# Altium PCB Bpod Controller.PcbDoc
Units mm, origin at the board's own origin, x right, y up, seen from the top; angles counter-clockwise.
Board outline 222.25 x 73.66 mm, 2 copper layers (Top Layer, Bottom Layer); 35 components, 56 nets, 221 pads, 0 vias.
Unrouted connection lines stored in the file: 108.
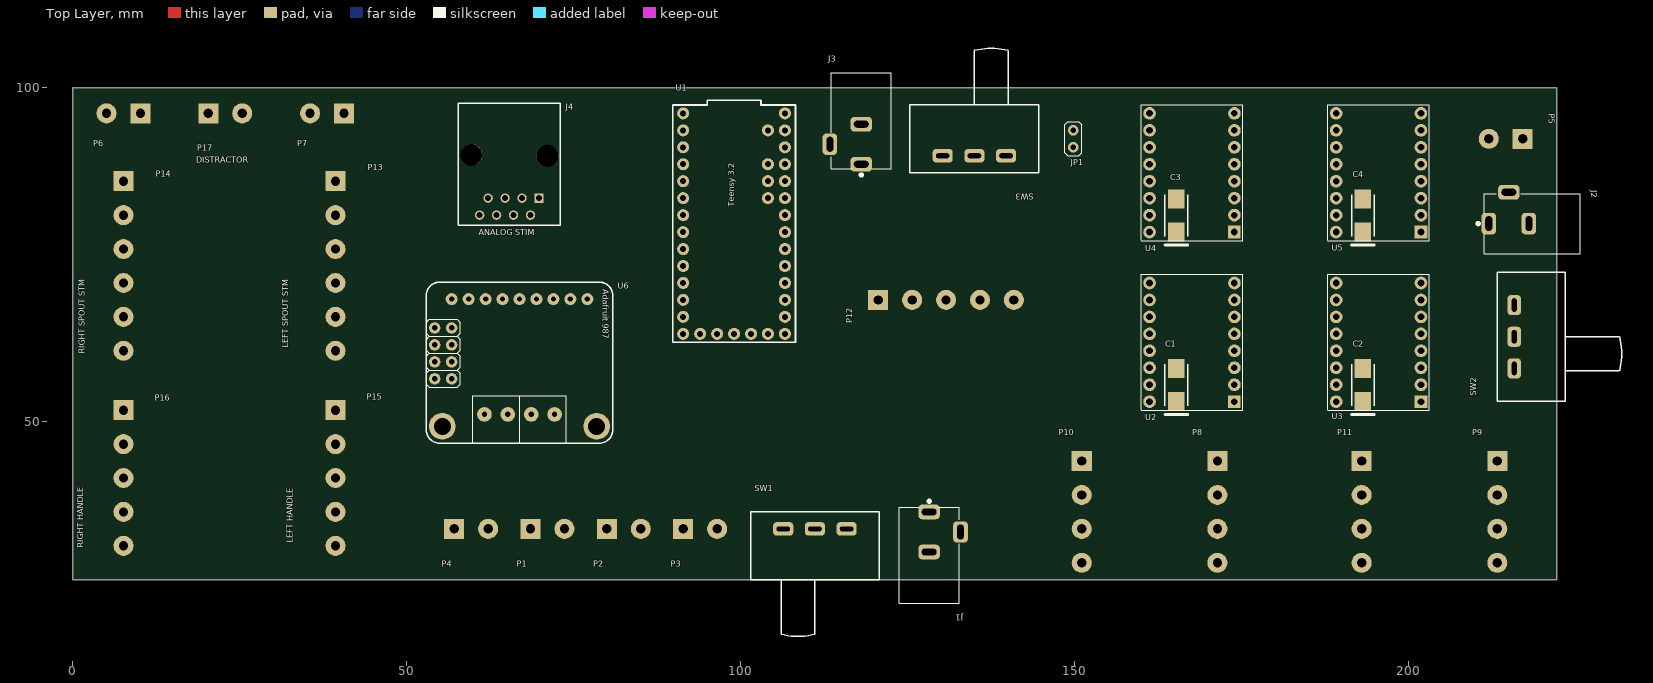
[diagram p0: Top Layer view]
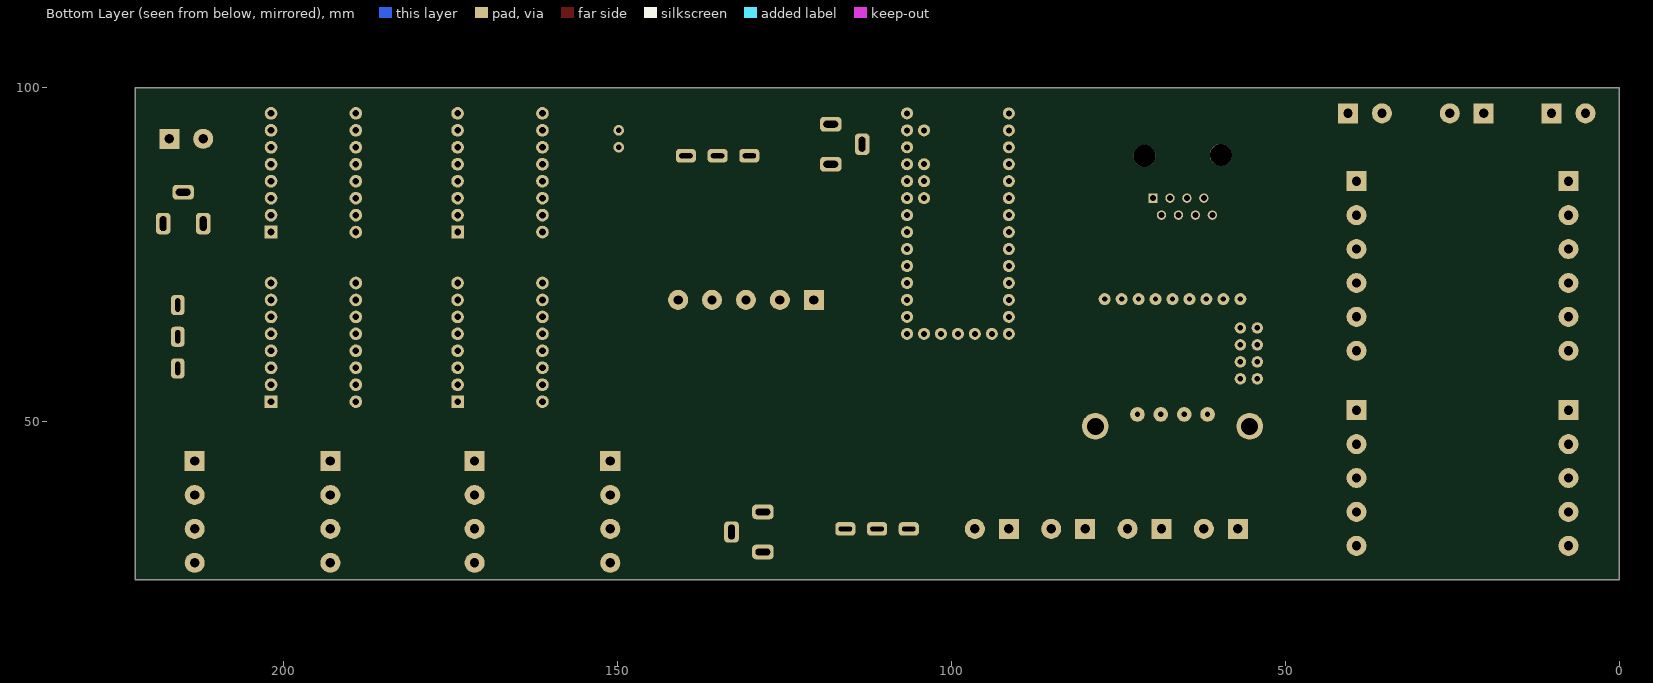
[diagram p1: Bottom Layer view, seen from below]

## Layer stack, top to bottom
Top Solder: solder mask 0.0102, Solder Resist, Dk 3.5
Top Layer: signal copper 0.0356
Dielectric 1: dielectric 0.32, FR-4, Dk 4.8
Bottom Layer: signal copper 0.0356
Bottom Solder: solder mask 0.0102, Solder Resist, Dk 3.5

## Board outline
0,26.34 0,100 222.25,100 222.25,26.34

## Design rules (kind name [scope] priority, off if disabled: settings)
Clearance [All] p1: gap=0.254 ignorepadtopadclearanceinfootprint=FALSE
PolygonConnect [All] p1: connectstyle=Relief reliefconductorwidth=0.254 reliefentries=4 polygonreliefangle="90 Angle" airgapwidth=0.254
RoutingVias [All] p1: holewidth=0.711 width=1.27 viastyle="Through Hole" minholewidth=0.711 minwidth=1.27 maxholewidth=0.711 maxwidth=1.27
SolderMaskExpansion [All] p1: expansion=0.102 istentingtop=FALSE
SupplyNets "Schematic Supply Nets_4" [InNet('GND1')] p1: voltage=0.000
SupplyNets "Schematic Supply Nets_3" [InNet('+12V')] p2: voltage=0.000
SupplyNets "Schematic Supply Nets_2" [InNet('+9V')] p3: voltage=0.000
SupplyNets "Schematic Supply Nets_1" [InNet('+5V')] p4: voltage=0.000
SupplyNets "Schematic Supply Nets" [InNet('GND')] p5: voltage=0.000
Width [All] p1: maxlimit=0.254 minlimit=0.254 preferedwidth=0.254
30 further rules are at their usual default settings.

## Components (designator, comment, footprint, x,y, rotation, side; value= is the part's Value field where it differs from the comment)
C1 "TAJC107K016RNJ" AVX-TAJ-C-2_M 165.291,55.485 r90 top locked value=100µF
C2 "TAJC107K016RNJ" AVX-TAJ-C-2_M 193.231,55.485 r90 top locked value=100µF
C3 "TAJC107K016RNJ" AVX-TAJ-C-2_M 165.291,80.885 r90 top locked value=100µF
C4 "TAJC107K016RNJ" AVX-TAJ-C-2_M 193.231,80.885 r90 top locked value=100µF
J1 "PJ-102AH" CUI_PJ-102AH 128.271,30 r270 top locked
J2 "PJ-102AH" CUI_PJ-102AH 218.591,79.68 r0 top locked
J3 "PJ-102AH" CUI_PJ-102AH 118.111,95.07 r90 top locked
J4 "5569118-1" 5569118-1-Footprint-1 71.121,89.84 r180 top locked
JP1 "SL 2 025 2 S" "SL 2_025_ 72_S-Footprint-1" 149.861,91.11 r180 top locked
P1 "282825-2" 282825-4-Footprint-1#1 68.581,33.96 r90 top locked
P2 "282825-2" 282825-4-Footprint-1#1 80.011,33.96 r90 top locked
P3 "282825-2" 282825-4-Footprint-1#1 91.441,33.96 r90 top locked
P4 "282825-2" 282825-4-Footprint-1#1 57.151,33.96 r90 top locked
P5 "282825-2" 282825-4-Footprint-1#1 217.171,92.38 r270 top locked
P6 "282825-2" 282825-4-Footprint-1#1 10.16,96.19 r270 top locked
P7 "282825-2" 282825-4-Footprint-1#1 40.641,96.19 r270 top locked
P8 "282825-4" 282825-4-Footprint-1#2 171.451,44.12 r0 top locked
P9 "282825-4" 282825-4-Footprint-1#2 213.361,44.12 r0 top locked
P10 "282825-4" 282825-4-Footprint-1#2 151.131,44.12 r0 top locked
P11 "282825-4" 282825-4-Footprint-1#2 193.041,44.12 r0 top locked
P12 "282825-5" 282825-4-Footprint-1#3 120.651,68.25 r90 top locked
P13 "282825-6" 282825-4-Footprint-1#4 39.371,86.03 r0 top locked
P14 "282825-6" 282825-4-Footprint-1#4 7.621,86.03 r0 top locked
P15 "282825-5" 282825-4-Footprint-1#3 39.371,51.74 r0 top locked
P16 "282825-5" 282825-4-Footprint-1#3 7.621,51.74 r0 top locked
P17 "282825-2" 282825-4-Footprint-1#1 20.321,96.19 r90 top locked
SW1 "L102021ML04Q" L102021ML04Q-Footprint-1 106.426,33.96 r0 top locked
SW2 "L102021ML04Q" L102021ML04Q-Footprint-1 215.901,57.985 r90 top locked
SW3 "L102021ML04Q" L102021ML04Q-Footprint-1 139.806,89.84 r180 top locked
U1 "Teensy 3.2" "New footprint 1" 91.441,96.19 r0 top locked
U2 "DRV8834" "DRV8825 STEPPER MOTOR DRIVER CARRIER-Footprint-1" 173.991,53.01 r180 top locked
U3 "DRV8834" "DRV8825 STEPPER MOTOR DRIVER CARRIER-Footprint-1" 201.931,53.01 r180 top locked
U4 "DRV8834" "DRV8825 STEPPER MOTOR DRIVER CARRIER-Footprint-1" 173.991,78.41 r180 top locked
U5 "DRV8834" "DRV8825 STEPPER MOTOR DRIVER CARRIER-Footprint-1" 201.931,78.41 r180 top locked
U6 "987" 987-Footprint-1 77.09,68.377 r270 top locked

## Footprints (in the part's own frame and the unit in brackets; to place one, negate y for a bottom-side part, rotate by r counter-clockwise, add the part's x,y. Pads: shape width x height; smd on the part's side, far side on the other; paste and mask are expansions set on the pad)
987-Footprint-1 [mm]
  round 1.8 hole 0.8: 1(0,0) 2(0,-2.54) 3(0,-5.08) 4(0,-7.62) 5(0,-10.16) 6(0,-12.7) 7(0,-15.24) 8(0,-17.78) 9(0,-20.32)
  round 2.2 hole 0.8: 10(17.272,-4.91) 11(17.272,-8.41) 12(17.272,-11.91) 13(17.272,-15.41)
  round 1.7 hole 0.8: 14(4.318,-20.32) 15(4.318,-22.86) 16(6.858,-20.32) 17(6.858,-22.86) 18(9.398,-20.32) 19(9.398,-22.86) 20(11.938,-20.32) 21(11.938,-22.86)
  round 4 hole 2.54: 22(19.05,1.397) 23(19.05,-21.717)
  silkscreen extent -2.54,-24.13 21.59,3.81, body extent -1.25,-21.59 1.25,1.27, height 8
282825-4-Footprint-1#1 [mm]
  rect 3x3 hole 1.4 paste-2539.97: 1(0,0)
  round 3 hole 1.4 paste-2539.97: 2(0,-5.08)
  body extent -4.5,-7.62 3.85,2.54, height 12
282825-4-Footprint-1#2 [mm]
  rect 3x3 hole 1.4 paste-2539.97: 1(0,0)
  round 3 hole 1.4 paste-2539.97: 2(0,-5.08) 3(0,-10.16) 4(0,-15.24)
  body extent -4.5,-17.78 3.85,2.54, height 12
282825-4-Footprint-1#3 [mm]
  rect 3x3 hole 1.4 paste-2539.97: 1(0,0)
  round 3 hole 1.4 paste-2539.97: 2(0,-5.08) 3(0,-10.16) 4(0,-15.24) 5(0,-20.32)
  body extent -4.5,-22.86 3.85,2.54, height 12
282825-4-Footprint-1#4 [mm]
  rect 3x3 hole 1.4 paste-2539.97: 1(0,0)
  round 3 hole 1.4 paste-2539.97: 2(0,-5.08) 3(0,-10.16) 4(0,-15.24) 5(0,-20.32) 6(0,-25.4)
  body extent -4.5,-27.94 3.85,2.54, height 12
5569118-1-Footprint-1 [mm]
  rect 1.4x1.4 hole 0.9: 1(1.27,6.35)
  round 1.4 hole 0.9: 2(2.54,8.89) 3(3.81,6.35) 4(5.08,8.89) 5(6.35,6.35) 6(7.62,8.89) 7(8.89,6.35) 8(10.16,8.89)
  round 3.3 hole 3.3: X(0,0) Y(11.43,-0.127)
  silkscreen extent -1.91,-7.87 13.33,10.42, body extent -1.91,-7.95 13.33,10.31, height 12.6
AVX-TAJ-C-2_M [mm] "Molded Capacitor, 2-Leads, Body 6.2x3.4mm, IPC Low Density"
  rect 2.85x2.45 smd: 1(-2.475,0) 2(2.475,0)
  silkscreen extent -4.4,-1.7 3.1,1.7, body extent -3.32,-1.7 3.32,1.7, height 2.8
CUI_PJ-102AH [mm]
  rrect50% 2.2x3.2 hole 1 slot 2.2 at 90 deg: 1(-6.5,0) 2(-0.5,0)
  rrect50% 3.2x2.2 hole 1 slot 2.2 at 0 deg: 3(-3.5,4.7)
  silkscreen extent -8.3,-4.5 7.2,4.5, body extent -7.2,-4.5 7.2,4.9, height 11
"DRV8825 STEPPER MOTOR DRIVER CARRIER-Footprint-1" [mm]
  rect 1.9x1.9 hole 1: 1(0,0)
  round 1.9 hole 1: 2(0,-2.54) 3(0,-5.08) 4(0,-7.62) 5(0,-10.16) 6(0,-12.7) 7(0,-15.24) 8(0,-17.78) 9(12.7,-17.78) 10(12.7,-15.24) 11(12.7,-12.7) 12(12.7,-10.16) 13(12.7,-7.62) 14(12.7,-5.08) 15(12.7,-2.54) 16(12.7,0)
  silkscreen extent -1.27,-19.05 13.93,1.27, body extent -1.25,-19.05 13.99,1.28, height 13.72
L102021ML04Q-Footprint-1 [mm]
  rrect50% 3x2 hole 0.7 slot 2 at 0 deg: 1(0,0) 2(4.75,0) 3(9.5,0)
  silkscreen extent -4.9,-16.1 14.4,2.54, body extent -4.9,-16.12 14.4,4.32, height 10.46
"New footprint 1" [mm]
  round 1.8 hole 0.9 paste-2539.97: 1(0,0) 2(0,-2.54) 3(0,-5.08) 4(0,-7.62) 5(0,-10.16) 6(0,-12.7) 7(0,-15.24) 8(0,-17.78) 9(0,-20.32) 10(0,-22.86) 11(0,-25.4) 12(0,-27.94) 13(0,-30.48) 14(0,-33.02) 15(2.54,-33.02) 16(5.08,-33.02) 17(7.62,-33.02) 18(10.16,-33.02) 19(12.7,-33.02) 20(15.24,-33.02) 21(15.24,-30.48) 22(15.24,-27.94) 23(15.24,-25.4) 24(15.24,-22.86) 25(15.24,-20.32) 26(15.24,-17.78) 27(15.24,-15.24) 28(15.24,-12.7) 29(15.24,-10.16) 30(15.24,-7.62) 31(15.24,-5.08) 32(15.24,-2.54) 33(15.24,0) 34(12.7,-2.54) 35(12.7,-7.62) 36(12.7,-10.16) 37(12.7,-12.7)
  silkscreen extent -1.57,-34.27 16.81,1.95, body extent -1.25,-34.29 16.49,1.27, height 8
"SL 2_025_ 72_S-Footprint-1" [mm]
  round 1.6 hole 0.8: 1(0,0) 2(0,-2.54)
  silkscreen extent -1.27,-3.81 1.27,1.27, body extent -1.27,-3.77 1.27,1.23, height 8.6

## Part data
C1 C2 C3 C4: library part CMP-001-00046-9, "Standard Tantalum, 100 uF, +/- 10%, 16 V, -55 to 125 degC, 2312 (6032 Metric), RoHS, Tape and Reel", Capacitor Type=Tantalum, Case/Package=2412, Manufacturer=AVX, Max Operating Temperature=125°C, Min Operating Temperature=-55°C, Package Description="2-Pin Surface Mount Device, Body 6 x 3.25 mm", Package Quantity=500, Package Reference=TAJ-C-2, Resistance=1Ohm, Tolerance=10%, Voltage Rating=16V, Datasheet URL=http://datasheets.avx.com/TAJ.pdf, Datasheet Version=Feb-16, ESR=1Ohm, Manufacturer URL=http://www.avx.com/, Mounting Technology=SM, Packaging=TapeandReel, RoHS Compliant=True
J1 J2 J3: library part CMP-00027-00002-4, "12V, 2.5A, 2mm Dia", Mounting Technology=Board, Pins=3, RoHS Compliant=Yes, user=IBI-TAE
J4: library part CMP-002-00096-4, "Telecom and Datacom Connector, 8 Contact(s), Female, Right Angle, Solder Terminal, Locking, Jack", Case/Package=RJ45, Max Operating Temperature=85°C, Min Operating Temperature=-40°C, Connector Type="TELECOM AND DATACOM CONNECTOR", Mounting Technology=Panel,Board, Pins=8, RoHS Compliant=Yes, user=IBI-TAE
JP1: library part CMP-002-00095-2, "Fischer Elektronik SL 2/025/ 72/S", Link=https://www.fischerelektronik.de/web_fischer/de_DE/Steckverbinder/G01/Stiftleisten/$catalogue/fischerData/PR/SL%202%20025/, user=IBI-TAE
P1 P2 P3 P4 P5 P6 P7 P17: library part CMP-002-00093-2, "Strip Terminal Block, 15A, 1 Row(s), 1 Deck(s)", Max Current Rating=15A, Voltage Rating=300V, Connector Type="Pluggable Terminal Block", Gender=male, Mounting Technology=Board, Pins=4, RoHS Compliant=Yes, user=IBI-TAE
P8 P9 P10 P11: library part CMP-002-00090-2, "Strip Terminal Block, 15A, 1 Row(s), 1 Deck(s)", Max Current Rating=15A, Voltage Rating=300V, Connector Type="Pluggable Terminal Block", Gender=male, Mounting Technology=Board, Pins=4, RoHS Compliant=Yes, user=IBI-TAE
P12 P15 P16: library part CMP-002-00091-3, "Strip Terminal Block, 15A, 1 Row(s), 1 Deck(s)", Max Current Rating=15A, Voltage Rating=300V, Connector Type="Pluggable Terminal Block", Gender=male, Mounting Technology=Board, Pins=5, RoHS Compliant=Yes, user=IBI-TAE
P13 P14: library part CMP-002-00092-3, "Strip Terminal Block, 15A, 1 Row(s), 1 Deck(s)", Max Current Rating=15A, Voltage Rating=300V, Connector Type="Pluggable Terminal Block", Gender=male, Mounting Technology=Board, Pins=6, RoHS Compliant=Yes, user=IBI-TAE
SW1 SW2 SW3: library part CMP-011-00017-3, "Slide Switch, 1 Positions, SPDT, Latched, 4A, 28VDC, Solder Terminal, Through Hole-right Angle", Max Operating Temperature=65°C, Min Operating Temperature=-30°C, Mounting Technology="Through Hole", RoHS Compliant=Yes
U1: library part CMP-00000-5, "Development Boards & Kits, ARM Teensy 3.2 and header", user=IBI-TAE
U2 U3 U4 U5: library part CMP-00024-00007-1, "DRV8834 Low-Voltage Stepper Motor Driver Carrier", Continuous current per phase=1,5A, Max current per phase=2A, Max Supply Voltage=10,8V, Min Supply Voltage=2,5V, Pins=16, user=IBI-TAE, website=https://www.pololu.com/product/2134
U6: library part CMP-00027-00003-5, "Stereo 3.7W Class D Amplifier - Max98306; Product Range: -; Plug Type: - Rohs Compliant: Yes", user=IBI-TAE

## Nets (pads, with @x,y where several pads share a name; then routed paths per layer and width w, separated by ;. In a path a pad name is that pad's centre, name@x,y a point inside that pad or via, vN(x,y) a via of type N, cw(c..) or ccw(c..) an arc to the next point about the centre after c; other vN are vias at no path point)
+5V: P6.1 P7.1 SW3.3 U1.33 U2.6 U3.6 U4.6 U5.6 U6.1
+9V: C1.1 C2.1 C3.1 C4.1 P5.1 SW2.3 U2.16 U3.16 U4.16 U5.16
+12V: P1.1 P2.1 P3.1 P4.1 SW1.3
GND: J1.2 J3.2 J4.1 JP1.2 P1.2 P2.2 P3.2 P4.2 P6.2 P7.2 P13.5 P14.5 P15.3 P15.5 P16.3 P16.5 P17.1 U1.1 U1.17 U1.32 U6.2 U6.5 U6.6
GND1: C1.2 C2.2 C3.2 C4.2 J2.2 JP1.1 P5.2 U2.9 U2.15 U3.9 U3.15 U4.9 U4.15 U5.9 U5.15
NetJ1_1: J1.1 SW1.2
NetJ2_1: J2.1 SW2.2
NetJ3_1: J3.1 SW3.2
NetJ4_2: J4.2 U6.4
NetJ4_3: J4.3 U6.7
NetJ4_4: J4.4 P13.6
NetJ4_5: J4.5 P14.6
NetJ4_6: J4.6 P15.2
NetJ4_7: J4.7 P16.2
NetJ4_8: J4.8 P17.2
NetP8_1: P8.1 U2.12
NetP8_2: P8.2 U2.11
NetP8_3: P8.3 U2.13
NetP8_4: P8.4 U2.14
NetP9_1: P9.1 U3.12
NetP9_2: P9.2 U3.11
NetP9_3: P9.3 U3.13
NetP9_4: P9.4 U3.14
NetP10_1: P10.1 U4.12
NetP10_2: P10.2 U4.11
NetP10_3: P10.3 U4.13
NetP10_4: P10.4 U4.14
NetP11_1: P11.1 U5.12
NetP11_2: P11.2 U5.11
NetP11_3: P11.3 U5.13
NetP11_4: P11.4 U5.14
NetP12_1: P12.1 U1.26
NetP12_2: P12.2 U1.27
NetP12_3: P12.3 U1.28
NetP12_4: P12.4 U1.6
NetP12_5: P12.5 U1.5
NetP13_1: P13.1 U1.29
NetP13_2: P13.2 U6.11
NetP13_3: P13.3 U6.10
NetP13_4: P13.4 U1.7
NetP14_1: P14.1 U1.30
NetP14_2: P14.2 U6.12
NetP14_3: P14.3 U6.13
NetP14_4: P14.4 U1.8
NetP15_1: P15.1 U1.22
NetP15_4: P15.4 U1.9
NetP16_1: P16.1 U1.23
NetP16_4: P16.4 U1.10
NetU1_11: U1.11 U4.7
NetU1_12: U1.12 U4.8
NetU1_13: U1.13 U5.7
NetU1_14: U1.14 U5.8
NetU1_20: U1.20 U2.7
NetU1_21: U1.21 U2.8
NetU1_24: U1.24 U3.7
NetU1_25: U1.25 U3.8
pads on no net: J1.3 J2.3 J3.3 J4.X J4.Y SW1.1 SW2.1 SW3.1 U1.2 U1.3 U1.4 U1.15 U1.16 U1.18 U1.19 U1.31 U1.34 U1.35 U1.36 U1.37 U2.1 U2.2 U2.3 U2.4 U2.5 U2.10 U3.1 U3.2 U3.3 U3.4 U3.5 U3.10 U4.1 U4.2 U4.3 U4.4 U4.5 U4.10 U5.1 U5.2 U5.3 U5.4 U5.5 U5.10 U6.3 U6.8 U6.9 U6.14 U6.15 U6.16 U6.17 U6.18 U6.19 U6.20 U6.21 U6.22 U6.23

## Silkscreen, mask and mechanical layers (free items; w line width, h text height)
Top Overlay:
  text "DISTRACTOR" at 18.542,88.519 h1.5
  text "ANALOG STIM" at 60.833,77.624 h1.5
  text "LEFT SPOUT STM" at 32.612,61.087 h1.5 r90
  text "RIGHT SPOUT STM" at 2.132,60.198 h1.5 r90
  text "LEFT HANDLE" at 33.247,31.877 h1.5 r90
  text "RIGHT HANDLE" at 1.878,31.115 h1.5 r90
Mechanical 1:
  the board outline again, w0.1

## Text inside footprints (layer, text, board x,y; h text height)
U6: Top Overlay "Adafruit 987" at 79.109,69.877 h1.5 r270